# EAGLE board shimboard_revC_V4 (EAGLE 9.1.1), part 1 of 2
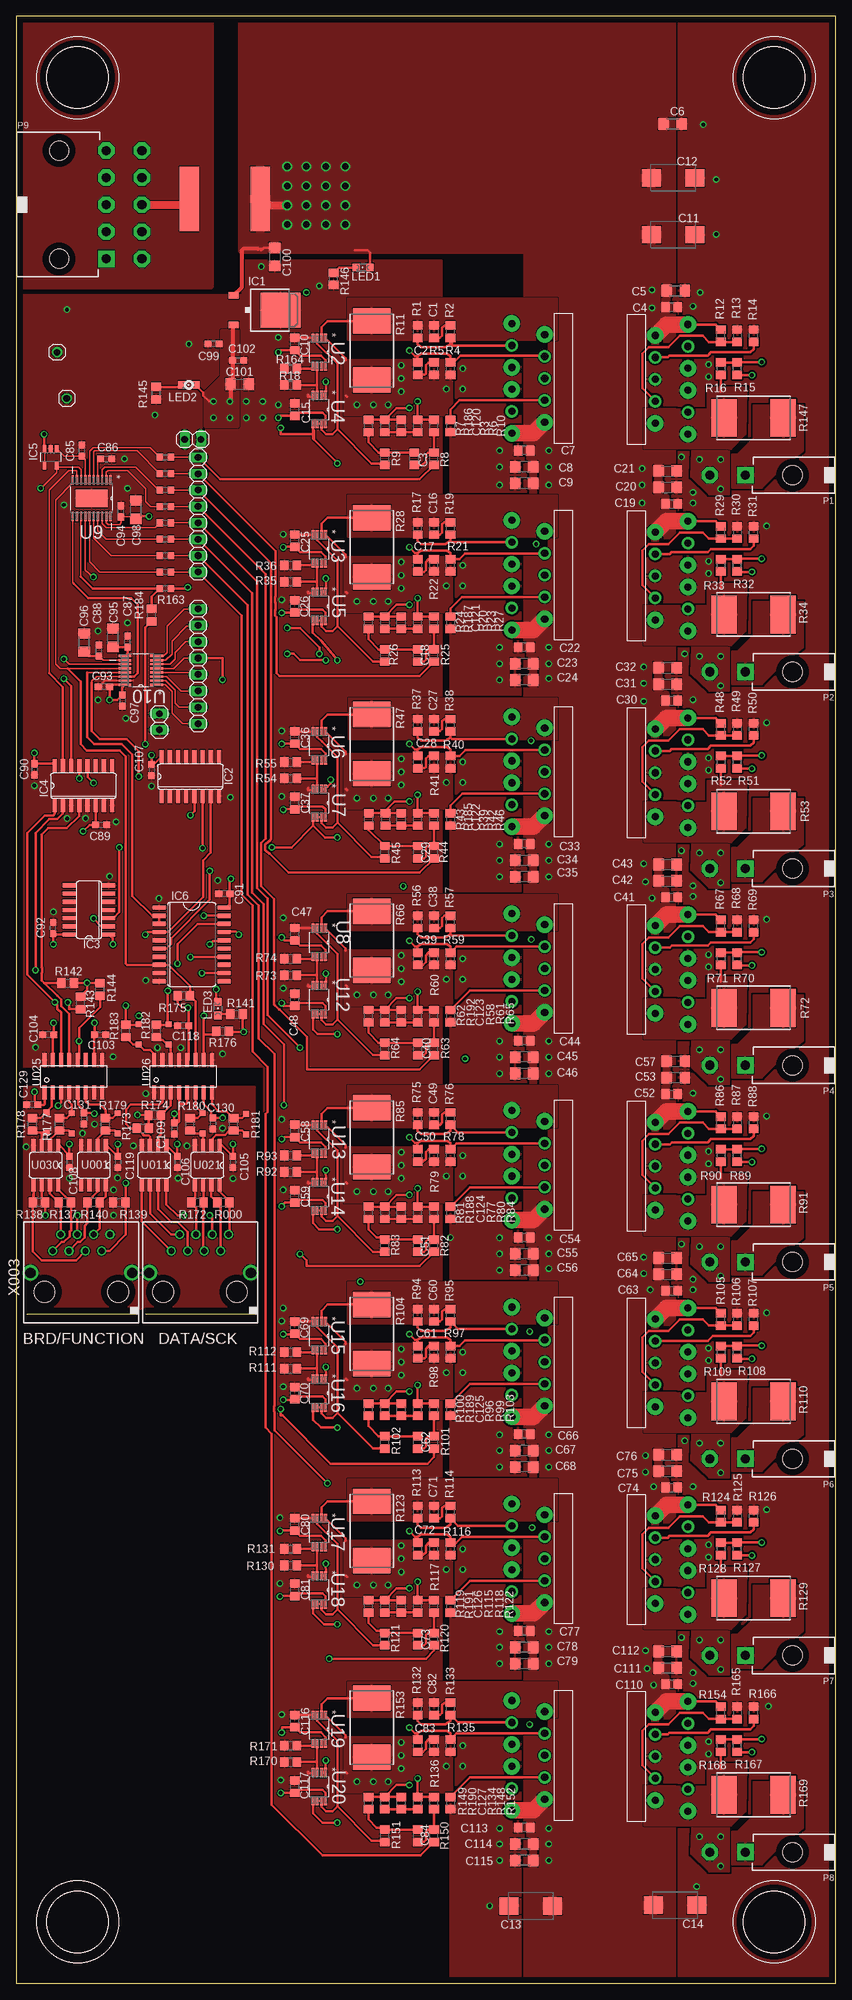
[diagram p0: board, top side]
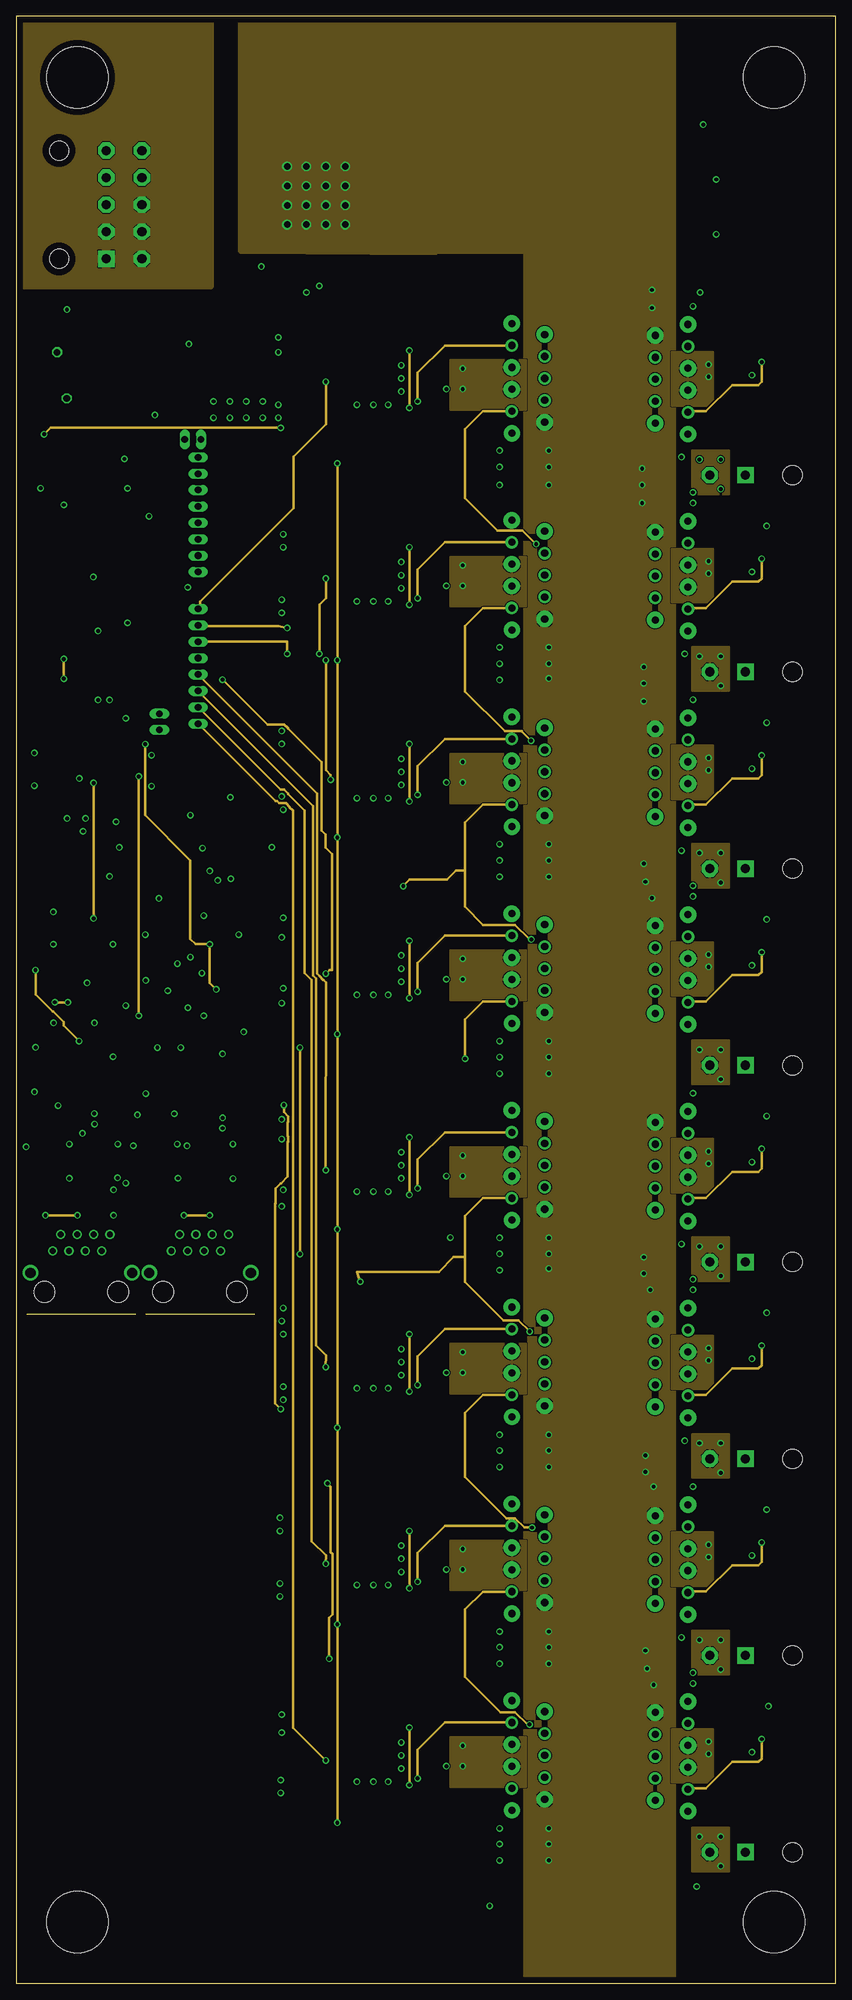
[diagram p1: board, inner layer Route2]
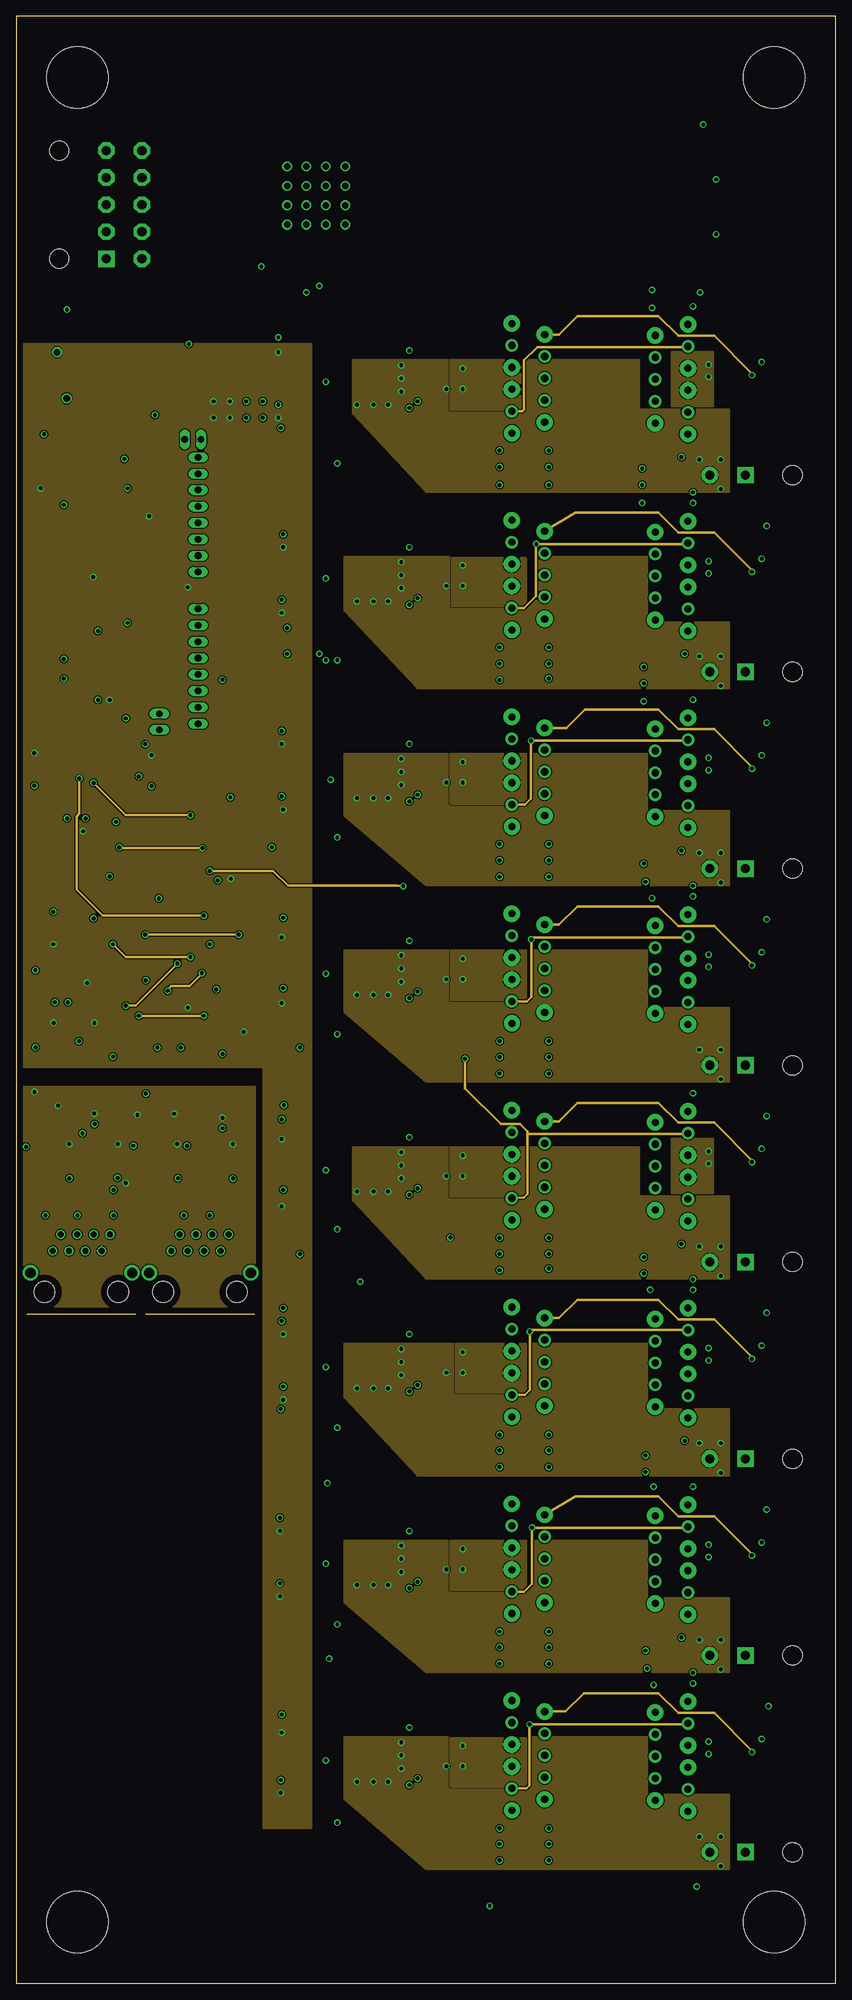
[diagram p2: board, inner layer Route15]
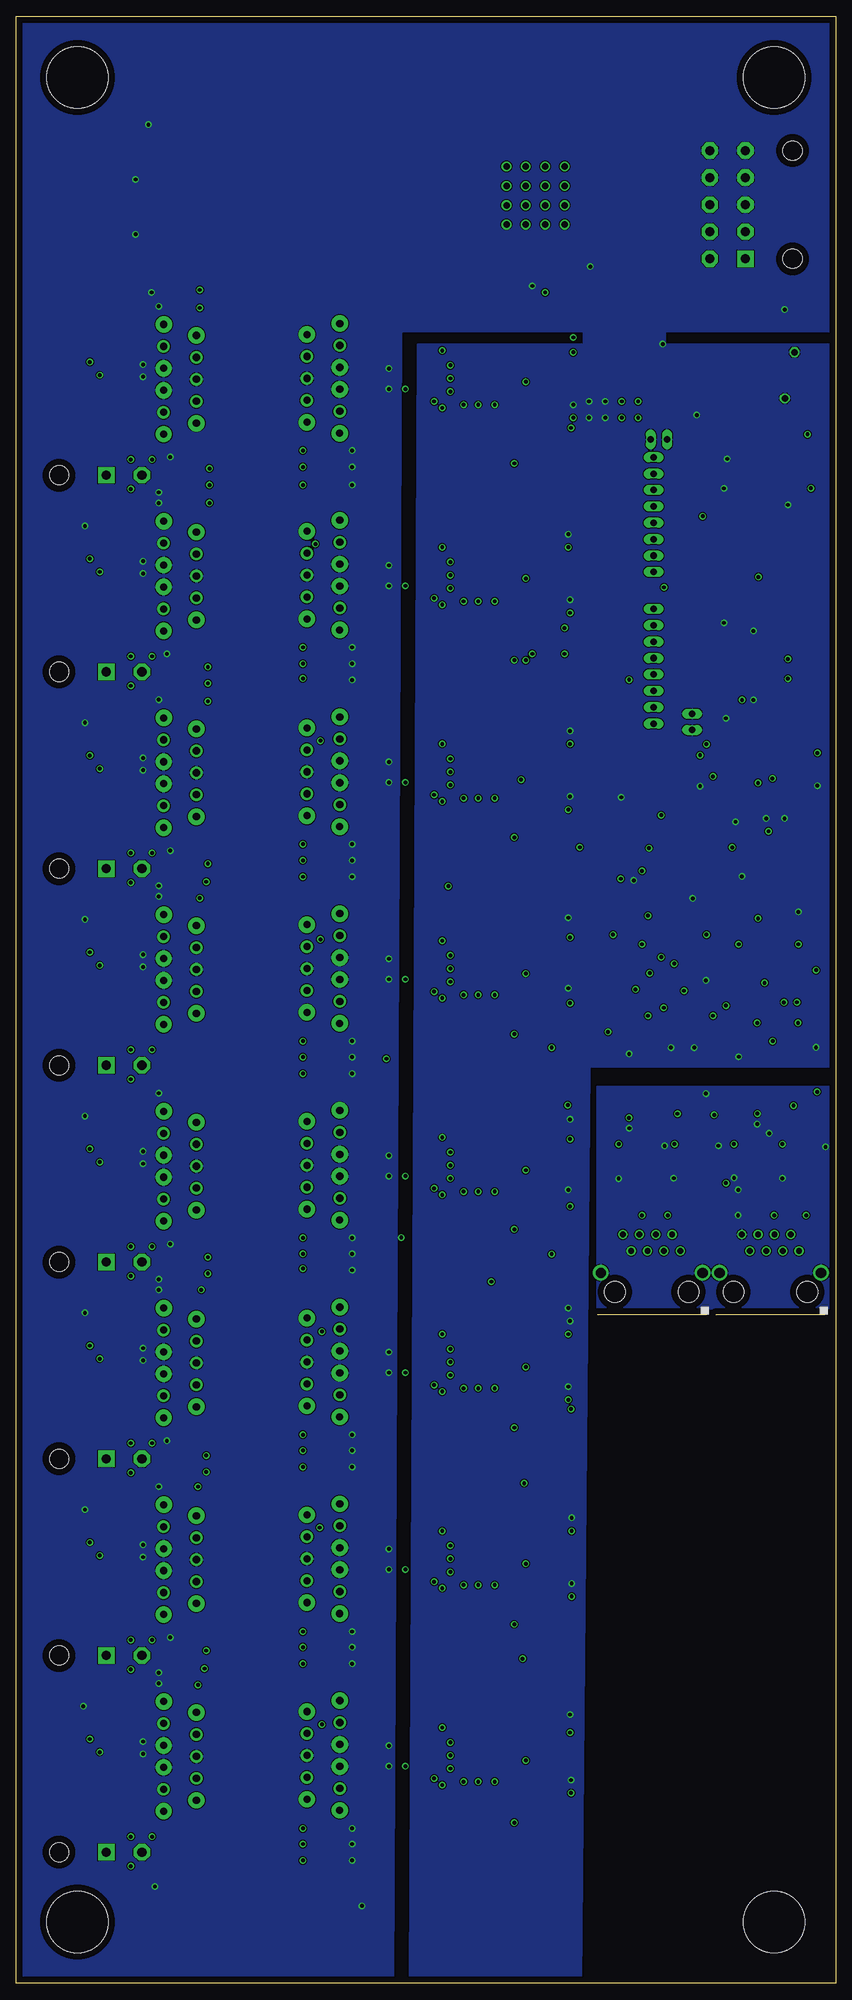
[diagram p3: board, bottom side, seen from below]

Size 127 x 304.8 mm. Coordinates in mm from the lower left corner, seen from the top.
Outline: 0,0 127,0 127,304.8 0,304.8 0,0
Copper layers (1+2*15+16): Top 0.035mm / dielectric 0.5mm / Route2 0.035mm / dielectric 0.5mm / Route15 0.035mm / dielectric 0.5mm / Bottom 0.035mm
Design rules "default *": minimum track width 10mil, minimum drill 0.3mm, track to track 6mil, track to pad 6mil, pad to pad 6mil, via to via 0.3mm, smd to smd 6mil, copper to edge 40mil, drill to drill 0.3mm, minimum pad ring 10mil, minimum via ring 8mil, stop-mask expansion 4mil, vias tented up to drill 0mil, thermal gap 6mil
Holes 9.53 mm at 9.53,9.53 117.47,9.53 9.53,295.27 117.47,295.27
tKeepout: area 3.4,3.4 to 15.6,15.6; area 111.4,3.4 to 123.6,15.6; area 3.4,289.2 to 15.6,301.4; area 111.4,289.2 to 123.6,301.4

## Footprints (pad centres in the part's own frame; a part is rotated, then mirrored left to right if it is on the bottom)
C0805 = smd 1.3 x 1.5: 1 -0.95,0; 2 0.95,0
C1206 = smd 1.6 x 1.8: 1 -1.4,0; 2 1.4,0
D/7343-31W = smd 2.95 x 2.7: + 3.375,0; - -3.375,0
C0603 = smd 1.1 x 1: 1 -0.85,0; 2 0.85,0
LINEAR_TO252 = smd 1 x 1.6: 1 -2.28,-4.8; 2 2.28,-4.8 | smd 5.4 x 6.2: 3 0,2.5
SO16 = smd 0.66 x 2.032: 1 -4.445,-3.073; 2 -3.175,-3.073; 3 -1.905,-3.073; 4 -0.635,-3.073; 5 0.635,-3.073; 6 1.905,-3.073; 7 3.175,-3.073; 8 4.445,-3.073; 9 4.445,3.073; 10 3.175,3.073; 11 1.905,3.073; 12 0.635,3.073; 13 -0.635,3.073; 14 -1.905,3.073; 15 -3.175,3.073; 16 -4.445,3.073
SO14 = smd 0.66 x 2.032: 1 -3.81,-3.073; 2 -2.54,-3.073; 3 -1.27,-3.073; 4 0,-3.073; 5 1.27,-3.073; 6 2.54,-3.073; 7 3.81,-3.073; 8 3.81,3.073; 9 2.54,3.073; 10 1.27,3.073; 11 0,3.073; 12 -1.27,3.073; 13 -2.54,3.073; 14 -3.81,3.073
SOT23-5 = smd 0.6 x 1.2: 1 -0.95,-1.306; 2 0,-1.306; 3 0.95,-1.306; 4 0.95,1.306; 5 -0.95,1.306
SO20W = smd 0.66 x 2.032: 1 -5.715,-5.029; 2 -4.445,-5.029; 3 -3.175,-5.029; 4 -1.905,-5.029; 5 -0.635,-5.029; 6 0.635,-5.029; 7 1.905,-5.029; 8 3.175,-5.029; 9 4.445,-5.029; 10 5.715,-5.029; 11 5.715,5.029; 12 4.445,5.029; 13 3.175,5.029; 14 1.905,5.029; 15 0.635,5.029; 16 -0.635,5.029; 17 -1.905,5.029; 18 -3.175,5.029; 19 -4.445,5.029; 20 -5.715,5.029
1X08 = drill 1.016 long: 1 -8.89,0; 2 -6.35,0; 3 -3.81,0; 4 -1.27,0; 5 1.27,0; 6 3.81,0; 7 6.35,0; 8 8.89,0
1X02 = drill 1.016 long: 1 -1.27,0; 2 1.27,0
1X01 = drill 1.016 octagon: 1 0,0
CHIPLED_0805 = smd 1.2 x 1.2: A 0,-1.05; C 0,1.05
39-30-?02? = drill 1.422 pad 2.54 square: 1 0,0 | drill 1.422 pad 2.54 octagon: 2 0,5.512 | hole 3: 0,-7.3
39-30-?10? = drill 1.422 pad 2.54 square: 1 8.382,0 | drill 1.422 pad 2.54 octagon: 2 4.191,0; 3 0,0; 4 -4.191,0; 5 -8.382,0; 6 8.382,5.512; 7 4.191,5.512; 8 0,5.512; 9 -4.191,5.512; 10 -8.382,5.512 | hole 3: -8.382,-7.3; 8.382,-7.3
R0805 = smd 1.3 x 1.5: 1 -0.95,0; 2 0.95,0
R4527 = smd 3.94 x 5.84: 1 -4.575,0; 2 4.575,0
M0805 = smd 1.3 x 1.6: 1 -0.95,0; 2 0.95,0
R0603 = smd 1 x 1.1: 1 -0.85,0; 2 0.85,0
SO08-1 = smd 0.66 x 2.032: 1 -1.905,-3.073; 2 -0.635,-3.073; 3 0.635,-3.073; 4 1.905,-3.073; 5 1.905,3.073; 6 0.635,3.073; 7 -0.635,3.073; 8 -1.905,3.073
SOP65P490X110-8N = smd 1.422 x 0.432: 1 -2.184,0.965; 2 -2.184,0.33; 3 -2.184,-0.33; 4 -2.184,-0.965; 5 2.184,-0.965; 6 2.184,-0.33; 7 2.184,0.33; 8 2.184,0.965
SOP65P640X120-21N = smd 1.473 x 0.356: 1 -2.819,2.921; 2 -2.819,2.286; 3 -2.819,1.626; 4 -2.819,0.965; 5 -2.819,0.33; 6 -2.819,-0.33; 7 -2.819,-0.965; 8 -2.819,-1.626; 9 -2.819,-2.286; 10 -2.819,-2.921; 11 2.819,-2.921; 12 2.819,-2.286; 13 2.819,-1.626; 14 2.819,-0.965; 15 2.819,-0.33; 16 2.819,0.33; 17 2.819,0.965; 18 2.819,1.626; 19 2.819,2.286; 20 2.819,2.921 | smd 2.743 x 4.953: 21 0,0
SOP63P600X175-16N = smd 1.981 x 0.356: 1 -2.464,2.235; 2 -2.464,1.575; 3 -2.464,0.965; 4 -2.464,0.305; 5 -2.464,-0.305; 6 -2.464,-0.965; 7 -2.464,-1.575; 8 -2.464,-2.235; 9 2.464,-2.235; 10 2.464,-1.575; 11 2.464,-0.965; 12 2.464,-0.305; 13 2.464,0.305; 14 2.464,0.965; 15 2.464,1.575; 16 2.464,2.235
ACSL-SO16 = smd 2.16 x 0.64: 1 -0.96,9.6; 2 -0.96,8.32; 3 -0.96,7.04; 4 -0.96,5.76; 5 -0.96,4.48; 6 -0.96,3.2; 7 -0.96,1.92; 8 -0.96,0.64; 9 4.05,0.64; 10 4.05,1.92; 11 4.05,3.2; 12 4.05,4.48; 13 4.05,5.76; 14 4.05,7.04; 15 4.05,8.32; 16 4.05,9.6
881 = smd 3 x 10: P$1 -5,0; P$2 6,0
1N4148 = smd 0.9 x 0.95: 1 -1.6,0; 2 1.55,0
OPA549 = drill 1.1 pad 2.54: PIN$1 0,0; PIN$2 1.7,5.08; PIN$5 6.8,0; PIN$7 10.2,0; PIN$10 15.3,5.08; PIN$11 17,0.02 | drill 1.1 pad 1.93: PIN$3 3.4,0; PIN$4 5.1,5.08; PIN$6 8.5,5.08; PIN$8 11.9,5.08; PIN$9 13.6,0
RJ45-VERTICAL = drill 0.9 pad 1.4: 1 -4.445,6.35; 2 -3.175,8.89; 3 -1.905,6.35; 4 -0.635,8.89; 5 0.635,6.35; 6 1.905,8.89; 7 3.175,6.35; 8 4.445,8.89 | drill 1.6 pad 2.1: G1 -7.875,2.95; G2 7.875,2.95 | hole 3.251: -5.715,0; 5.715,0

## Placement (x,y rotation side)
C1  100pF  [C0805]  64.77,255.91 90 top
C2  100pF  [C0805]  62.23,250.19 90 top
C3  1n  [C0805]  61.73,236.22 90 top
C4  0.1uF  [C0805]  101.6,259.71 0 top
C5  10uF  [C1206]  102.23,262.25 0 top
C6  10uF  [C1206]  101.73,288.12 0 top
C7  0.1uF  [C0805]  78.74,237.49 180 top
C8  10uF  [C1206]  78.74,234.95 180 top
C9  10uF  [C1206]  78.74,232.41 180 top
C10  0.1uF  [C0805]  43.18,254 90 top
C11  100u  [D/7343-31W]  101.85,270.94 180 top
C12  100u  [D/7343-31W]  101.85,279.75 180 top
C13  100u  [D/7343-31W]  79.76,11.99 0 top
C14  100u  [D/7343-31W]  102.11,12.11 180 top
C15  0.1uF  [C0805]  43.18,243.84 90 top
C16  100pF  [C0805]  64.77,225.43 90 top
C17  100pF  [C0805]  62.23,219.71 90 top
C18  1n  [C0805]  62.23,205.74 90 top
C19  0.1uF  [C0805]  101.6,229.24 0 top
C20  10uF  [C1206]  100.97,231.78 0 top
C21  10uF  [C1206]  100.97,234.31 0 top
C22  0.1uF  [C0805]  78.74,207.01 180 top
C23  10uF  [C1206]  78.74,204.47 180 top
C24  10uF  [C1206]  78.74,201.93 180 top
C25  0.1uF  [C0805]  43.18,223.52 90 top
C26  0.1uF  [C0805]  43.18,213.36 90 top
C27  100pF  [C0805]  64.77,194.94 90 top
C28  100pF  [C0805]  62.23,189.23 90 top
C29  1n  [C0805]  62.23,175.26 90 top
C30  0.1uF  [C0805]  101.6,198.75 0 top
C31  10uF  [C1206]  100.97,201.29 0 top
C32  10uF  [C1206]  100.97,203.84 0 top
C33  0.1uF  [C0805]  78.74,176.53 180 top
C34  10uF  [C1206]  78.74,173.99 180 top
C35  10uF  [C1206]  78.74,171.45 180 top
C36  0.1uF  [C0805]  43.18,193.04 90 top
C37  0.1uF  [C0805]  43.18,182.88 90 top
C38  100pF  [C0805]  64.77,164.47 90 top
C39  100pF  [C0805]  62.23,158.75 90 top
C40  1n  [C0805]  62.23,144.78 90 top
C41  0.1uF  [C0805]  101.6,168.28 0 top
C42  10uF  [C1206]  100.97,170.81 0 top
C43  10uF  [C1206]  100.97,173.35 0 top
C44  0.1uF  [C0805]  78.74,146.05 180 top
C45  10uF  [C1206]  78.74,143.51 180 top
C46  10uF  [C1206]  78.74,140.97 180 top
C47  0.1uF  [C0805]  43.18,162.56 90 top
C48  0.1uF  [C0805]  43.18,152.4 90 top
C49  100pF  [C0805]  64.77,133.99 90 top
C50  100pF  [C0805]  62.23,128.27 90 top
C51  1n  [C0805]  62.23,114.3 90 top
C52  0.1uF  [C0805]  101.6,137.79 0 top
C53  10uF  [C1206]  102.23,140.34 0 top
C54  0.1uF  [C0805]  78.74,115.57 180 top
C55  10uF  [C1206]  78.74,113.03 180 top
C56  10uF  [C1206]  78.74,110.49 180 top
C57  10uF  [C1206]  102.23,142.88 0 top
C58  0.1uF  [C0805]  43.18,132.08 90 top
C59  0.1uF  [C0805]  43.18,121.92 90 top
C60  100pF  [C0805]  64.77,103.5 90 top
C61  100pF  [C0805]  62.23,97.79 90 top
C62  1n  [C0805]  62.23,83.82 90 top
C63  0.1uF  [C0805]  101.6,107.31 0 top
C64  10uF  [C1206]  100.97,109.86 0 top
C65  10uF  [C1206]  100.97,112.39 0 top
C66  0.1uF  [C0805]  78.74,85.09 180 top
C67  10uF  [C1206]  78.74,82.55 180 top
C68  10uF  [C1206]  78.74,80.01 180 top
C69  0.1uF  [C0805]  43.18,101.6 90 top
C70  0.1uF  [C0805]  43.18,91.44 90 top
C71  100pF  [C0805]  64.77,73.03 90 top
C72  100pF  [C0805]  62.23,67.31 90 top
C73  1n  [C0805]  62.23,53.34 90 top
C74  0.1uF  [C0805]  101.6,76.83 0 top
C75  10uF  [C1206]  100.97,79.38 0 top
C76  10uF  [C1206]  100.97,81.92 0 top
C77  0.1uF  [C0805]  78.74,54.61 180 top
C78  10uF  [C1206]  78.74,52.07 180 top
C79  10uF  [C1206]  78.74,49.53 180 top
C80  0.1uF  [C0805]  43.18,71.12 90 top
C81  0.1uF  [C0805]  43.18,60.96 90 top
C82  100pF  [C0805]  64.77,42.55 90 top
C83  100pF  [C0805]  62.23,36.83 90 top
C84  1n  [C0805]  62.23,22.86 90 top
C85  0.1uF  [C0603]  10.18,237.47 90 top
C86  0.1uF  [C0603]  13.99,236.2 0 top
C87  0.1uF  [C0603]  17.29,207.88 90 top
C88  0.1uF  [C0603]  12.84,206.48 90 top
C89  0.1uF  [C0603]  13.16,179.5 0 top
C90  0.1uF  [C0603]  2.81,188.11 270 top
C91  0.1uF  [C0603]  32.27,168.85 180 top
C92  0.1uF  [C0603]  5.75,163.5 90 top
C93  0.1uF  [C0603]  13.61,200.89 180 top
C94  0.1uF  [C0603]  16.27,228.07 90 top
C95  10uF  [C1206]  15,208.5 90 top
C96  10uF  [C1206]  10.56,207.73 90 top
C97  1uF  [C0603]  16.47,198.78 270 top
C98  10uF  [C1206]  18.56,228.32 90 top
C99  0.1uF  [C0603]  30.59,254 180 top
C100  10uF  [C1206]  40.09,267.5 270 top
C101  10uF  [C1206]  34.65,247.78 0 top
C102  0.1uF  [C0603]  34.4,251.46 0 top
C103  0.1uF  [C0603]  13,147 0 top
C104  0.1uF  [C0603]  5,147 180 top
C105  0.1uF  [C0603]  33.62,127.25 270 top
C106  0.1uF  [C0603]  25.01,127.25 270 top
C107  0.1uF  [C0603]  21,188 270 top
C108  0.1uF  [C0603]  8.25,127.25 270 top
C109  0.1uF  [C0603]  24.51,132.46 270 top
C110  0.1uF  [C0805]  101.6,46.35 0 top
C111  10uF  [C1206]  100.97,48.9 0 top
C112  10uF  [C1206]  100.97,51.44 0 top
C113  0.1uF  [C0805]  78.74,24.13 180 top
C114  10uF  [C1206]  78.74,21.59 180 top
C115  10uF  [C1206]  78.74,19.05 180 top
C116  0.1uF  [C0805]  43.18,40.64 90 top
C117  0.1uF  [C0805]  43.18,30.48 90 top
C118  0.1uF  [C0603]  25.9,148.4 180 top
C119  0.1uF  [C0603]  15.75,127.25 270 top
C120  220p  [C0805]  59.69,241.3 90 top
C121  220p  [C0805]  59.69,210.82 90 top
C122  220p  [C0805]  59.69,180.34 90 top
C123  220p  [C0805]  59.69,149.86 90 top
C124  220p  [C0805]  59.69,119.38 90 top
C125  220p  [C0805]  59.69,88.9 90 top
C126  220p  [C0805]  59.69,58.42 90 top
C127  220p  [C0805]  59.69,27.94 90 top
C129  0.1uF  [C0603]  2.5,136.12 180 top
C130  0.1uF  [C0603]  30.48,133.22 270 top
C131  0.1uF  [C0603]  10.5,133.98 270 top
IC1  LINEAR_7805DT  [LINEAR_TO252]  38.5,259.25 270 top
IC2  74LS279D  [SO16]  27,187 0 top
IC3  7400D  [SO14]  11.3,166.32 90 top
IC4  74LS138D  [SO16]  10.43,185.57 0 top
IC5  LMV321M5  [SOT23-5]  5.35,236.45 180 top
IC6  74LS240DW  [SO20W]  27.21,160.98 270 top
JP1  [1X08]  28.21,204.06 270 top
JP2  [1X08]  28.21,227.56 270 top
JP3  [1X02]  22.21,195.46 90 top
JP4  [1X02]  27.39,239.21 180 top
JP5  [1X01]  7.84,245.58 0 top
JP6  [1X01]  6.35,252.73 0 top
LED1  [CHIPLED_0805]  53.78,265.85 90 top
LED2  [CHIPLED_0805]  26.78,247.65 90 top
LED3  [CHIPLED_0805]  31.25,151 0 top
P1  39-30-02?_S  [39-30-?02?]  113.03,233.68 90 top
P2  39-30-02?_S  [39-30-?02?]  113.03,203.2 90 top
P3  39-30-02?_S  [39-30-?02?]  113.03,172.72 90 top
P4  39-30-02?_S  [39-30-?02?]  113.03,142.24 90 top
P5  39-30-02?_S  [39-30-?02?]  113.03,111.76 90 top
P6  39-30-02?_S  [39-30-?02?]  113.03,81.28 90 top
P7  39-30-02?_S  [39-30-?02?]  113.03,50.8 90 top
P8  39-30-02?_S  [39-30-?02?]  113.03,20.32 90 top
P9  39-30-10?_S  [39-30-?10?]  13.97,275.59 270 top
R000  100  [R0805]  32.12,121 180 top
R1  51.1k  [R0805]  62.23,255.91 90 top
R2  5.1k  [R0805]  67.31,255.91 90 top
R3  22k  [R0805]  62.23,241.3 90 top
R4  51.1k  [R0805]  67.31,250.19 90 top
R5  5.1k  [R0805]  64.77,250.19 90 top
R6  68.1k  [R0805]  64.77,241.3 90 top
R7  68.1k  [R0805]  54.61,241.3 90 top
R8  10k  [R0805]  64.77,236.22 90 top
R9  10k  [R0805]  57.15,236.22 90 top
R10  10k  [R0805]  67.31,241.3 270 top
R11  0.2  [R4527]  55.12,252.98 270 top
R12  2k  [M0805]  109.22,255.27 270 top
R13  2k  [R0805]  111.76,255.27 270 top
R14  10k  [R0805]  114.3,255.27 90 top
R15  2k  [R0805]  111.76,250.19 90 top
R16  2k  [R0805]  109.22,250.19 270 top
R17  51.1k  [R0805]  62.23,225.43 90 top
R18  10k  [R0805]  42.55,247.65 0 top
R19  5.1k  [R0805]  67.31,225.43 90 top
R20  22k  [R0805]  62.23,210.82 90 top
R21  51.1k  [R0805]  67.31,219.71 90 top
R22  5.1k  [R0805]  64.77,219.71 90 top
R23  68.1k  [R0805]  64.77,210.82 90 top
R24  68.1k  [R0805]  54.61,210.82 90 top
R25  10k  [R0805]  64.77,205.74 90 top
R26  10k  [R0805]  57.15,205.74 90 top
R27  10k  [R0805]  67.31,210.82 270 top
R28  0.2  [R4527]  55.12,222.5 270 top
R29  2k  [M0805]  109.22,224.79 270 top
R30  2k  [R0805]  111.76,224.79 270 top
R31  10k  [R0805]  114.3,224.79 90 top
R32  2k  [R0805]  111.76,219.71 90 top
R33  2k  [R0805]  109.22,219.71 270 top
R34  0.2  [R4527]  114.3,212.09 0 top
R35  10k  [R0805]  42.55,217.17 0 top
R36  10k  [R0805]  42.55,219.71 0 top
R37  51.1k  [R0805]  62.23,194.94 90 top
R38  5.1k  [R0805]  67.31,194.94 90 top
R39  22k  [R0805]  62.23,180.34 90 top
R40  51.1k  [R0805]  67.31,189.23 90 top
R41  5.1k  [R0805]  64.77,189.23 90 top
R42  68.1k  [R0805]  64.77,180.34 90 top
R43  68.1k  [R0805]  54.65,180.34 90 top
R44  10k  [R0805]  64.77,175.26 90 top
R45  10k  [R0805]  57.15,175.26 90 top
R46  10k  [R0805]  67.31,180.34 270 top
R47  0.2  [R4527]  55.12,192.02 270 top
R48  2k  [M0805]  109.22,194.31 270 top
R49  2k  [R0805]  111.76,194.31 270 top
R50  10k  [R0805]  114.3,194.31 90 top
R51  2k  [R0805]  111.76,189.23 90 top
R52  2k  [R0805]  109.22,189.23 270 top
R53  0.2  [R4527]  114.3,181.61 0 top
R54  10k  [R0805]  42.55,186.69 0 top
R55  10k  [R0805]  42.55,189.23 0 top
R56  51.1k  [R0805]  62.23,164.47 90 top
R57  5.1k  [R0805]  67.31,164.47 90 top
R58  22k  [R0805]  62.23,149.86 90 top
R59  51.1k  [R0805]  67.31,158.75 90 top
R60  5.1k  [R0805]  64.77,158.75 90 top
R61  68.1k  [R0805]  64.77,149.86 90 top
R62  68.1k  [R0805]  54.61,149.86 90 top
R63  10k  [R0805]  64.77,144.78 90 top
R64  10k  [R0805]  57.15,144.78 90 top
R65  10k  [R0805]  67.31,149.86 270 top
R66  0.2  [R4527]  55.12,161.54 270 top
R67  2k  [M0805]  109.22,163.83 270 top
R68  2k  [R0805]  111.76,163.83 270 top
R69  10k  [R0805]  114.3,163.83 90 top
R70  2k  [R0805]  111.76,158.75 90 top
R71  2k  [R0805]  109.22,158.75 270 top
R72  0.2  [R4527]  114.3,151.13 0 top
R73  10k  [R0805]  42.55,156.21 0 top
R74  10k  [R0805]  42.55,158.75 0 top
R75  51.1k  [R0805]  62.23,133.99 90 top
R76  5.1k  [R0805]  67.31,133.99 90 top
R77  22k  [R0805]  62.23,119.38 90 top
R78  51.1k  [R0805]  67.31,128.27 90 top
R79  5.1k  [R0805]  64.77,128.27 90 top
R80  68.1k  [R0805]  64.77,119.38 90 top
R81  68.1k  [R0805]  54.61,119.38 90 top
R82  10k  [R0805]  64.77,114.3 90 top
R83  10k  [R0805]  57.15,114.3 90 top
R84  10k  [R0805]  67.31,119.38 270 top
R85  0.2  [R4527]  55.12,131.06 270 top
R86  2k  [M0805]  109.22,133.35 270 top
R87  2k  [R0805]  111.76,133.35 270 top
R88  10k  [R0805]  114.3,133.35 90 top
R89  2k  [R0805]  111.76,128.27 90 top
R90  2k  [R0805]  109.22,128.27 270 top
R91  0.2  [R4527]  114.3,120.65 0 top
R92  10k  [R0805]  42.55,125.73 0 top
R93  10k  [R0805]  42.55,128.27 0 top
R94  51.1k  [R0805]  62.23,103.5 90 top
R95  5.1k  [R0805]  67.31,103.5 90 top
R96  22k  [R0805]  62.23,88.9 90 top
R97  51.1k  [R0805]  67.31,97.79 90 top
R98  5.1k  [R0805]  64.77,97.79 90 top
R99  68.1k  [R0805]  64.77,88.9 90 top
R100  68.1k  [R0805]  54.61,88.9 90 top
R101  10k  [R0805]  64.77,83.82 90 top
R102  10k  [R0805]  57.15,83.82 90 top
R103  10k  [R0805]  67.31,88.9 270 top
R104  0.2  [R4527]  55.12,100.58 270 top
R105  2k  [M0805]  109.22,102.87 270 top
R106  2k  [R0805]  111.76,102.87 270 top
R107  10k  [R0805]  114.3,102.87 90 top
R108  2k  [R0805]  111.76,97.79 90 top
R109  2k  [R0805]  109.22,97.79 270 top
R110  0.2  [R4527]  114.3,90.17 0 top
R111  10k  [R0805]  42.55,95.25 0 top
R112  10k  [R0805]  42.55,97.79 0 top
R113  51.1k  [R0805]  62.23,73.03 90 top
R114  5.1k  [R0805]  67.31,73.03 90 top
R115  22k  [R0805]  62.23,58.42 90 top
R116  51.1k  [R0805]  67.31,67.31 90 top
R117  5.1k  [R0805]  64.77,67.31 90 top
R118  68.1k  [R0805]  64.77,58.42 90 top
R119  68.1k  [R0805]  54.61,58.42 90 top
R120  10k  [R0805]  64.77,53.34 90 top
R121  10k  [R0805]  57.15,53.34 90 top
R122  10k  [R0805]  67.31,58.42 270 top
R123  0.2  [R4527]  55.12,70.1 270 top
R124  2k  [M0805]  109.22,72.39 270 top
R125  2k  [R0805]  111.76,72.39 270 top
R126  10k  [R0805]  114.3,72.39 90 top
R127  2k  [R0805]  111.76,67.31 90 top
R128  2k  [R0805]  109.22,67.31 270 top
R129  0.2  [R4527]  114.3,59.69 0 top
R130  10k  [R0805]  42.55,64.77 0 top
R131  10k  [R0805]  42.55,67.31 0 top
R132  51.1k  [R0805]  62.23,42.55 90 top
R133  5.1k  [R0805]  67.31,42.55 90 top
R134  22k  [R0805]  62.23,27.94 90 top
R135  51.1k  [R0805]  67.31,36.83 90 top
R136  5.1k  [R0805]  64.77,36.83 90 top
R137  100  [R0805]  7.55,121 0 top
R138  100  [R0805]  3.55,121 180 top
R139  100  [R0805]  16,121 0 top
R140  100  [R0805]  12,121 180 top
R141  2k  [R0805]  34.17,150.19 0 top
R142  330  [R0805]  8,155 0 top
R143  330  [R0805]  10,151.9 90 top
R144  330  [R0805]  13,154 90 top
R145  2k  [R0805]  21.7,246.38 90 top
R146  2k  [R0805]  49.2,264.08 90 top
R147  0.2  [R4527]  114.3,242.57 0 top
R148  68.1k  [R0805]  64.77,27.94 90 top
R149  68.1k  [R0805]  54.61,27.94 90 top
R150  10k  [R0805]  64.77,22.86 90 top
R151  10k  [R0805]  57.15,22.86 90 top
R152  10k  [R0805]  67.31,27.94 270 top
R153  0.2  [R4527]  55.12,39.62 270 top
R154  2k  [M0805]  109.22,41.91 270 top
R155  0  [R0603]  23.13,236.45 0 top
R156  0  [R0603]  23.13,233.91 0 top
R157  0  [R0603]  23.13,231.37 0 top
R158  0  [R0603]  23.13,228.83 0 top
R159  0  [R0603]  23.13,226.29 0 top
R160  0  [R0603]  23.13,223.75 0 top
R161  0  [R0603]  23.13,221.21 0 top
R162  0  [R0603]  23.13,218.67 0 top
R163  10k  [R0603]  23.13,216.13 180 top
R164  10k  [R0805]  42.55,250.19 0 top
R165  2k  [R0805]  111.76,41.91 270 top
R166  10k  [R0805]  114.3,41.91 90 top
R167  2k  [R0805]  111.76,36.83 90 top
R168  2k  [R0805]  109.22,36.83 270 top
R169  0.2  [R4527]  114.3,29.21 0 top
R170  10k  [R0805]  42.55,34.29 0 top
R171  10k  [R0805]  42.55,36.83 0 top
R172  100  [R0805]  28.12,121 180 top
R173  330  [R0805]  19.64,132.48 0 top
R174  330  [R0805]  21.49,134.52 180 top
R175  330  [R0805]  26,153 180 top
R176  330  [R0805]  32,147.5 0 top
R177  330  [R0805]  6.73,133.1 90 top
R178  330  [R0805]  2.54,133.1 90 top
R179  330  [R0805]  13.84,133.1 90 top
R180  330  [R0805]  26.96,133.1 90 top
R181  330  [R0805]  33.72,133.1 90 top
R182  330  [R0805]  21.76,147.57 90 top
R183  330  [R0805]  17,147.57 90 top
R184  100  [R0805]  21,212 90 top
R185  2Meg  [R0805]  57.25,180.34 270 top
R186  2Meg  [R0805]  57.15,241.3 270 top
R187  2Meg  [R0805]  57.15,210.82 270 top
R188  2Meg  [R0805]  57.15,119.38 270 top
R189  2Meg  [R0805]  57.15,88.9 270 top
R190  2Meg  [R0805]  57.15,27.94 270 top
R191  2Meg  [R0805]  57.15,58.42 270 top
R192  2Meg  [R0805]  57.15,149.86 270 top
U001  65LVDS34  [SO08-1]  12,126.75 180 top
U2  INA170EA/250  [SOP65P490X110-8N]  46.99,252.73 270 top
U3  INA170EA/250  [SOP65P490X110-8N]  46.99,222.25 270 top
U4  OPA2340EA/250  [SOP65P490X110-8N]  46.99,243.84 270 top
U5  OPA2340EA/250  [SOP65P490X110-8N]  46.99,213.36 270 top
U6  INA170EA/250  [SOP65P490X110-8N]  46.99,191.77 270 top
U7  OPA2340EA/250  [SOP65P490X110-8N]  46.99,182.88 270 top
U8  INA170EA/250  [SOP65P490X110-8N]  46.99,161.29 270 top
U9  LTC2656BCFE-H16PBF  [SOP65P640X120-21N]  11.7,230.1 270 top
U10  LTC1863CGNPBF  [SOP63P600X175-16N]  19.32,203.43 180 top
U011  65LVDS9638  [SO08-1]  21.38,126.75 180 top
U12  OPA2340EA/250  [SOP65P490X110-8N]  46.99,152.4 270 top
U13  INA170EA/250  [SOP65P490X110-8N]  46.99,130.81 270 top
U14  OPA2340EA/250  [SOP65P490X110-8N]  46.99,121.92 270 top
U15  INA170EA/250  [SOP65P490X110-8N]  46.99,100.33 270 top
U16  OPA2340EA/250  [SOP65P490X110-8N]  46.99,91.44 270 top
U17  INA170EA/250  [SOP65P490X110-8N]  46.99,69.85 270 top
U18  OPA2340EA/250  [SOP65P490X110-8N]  46.99,60.96 270 top
U19  INA170EA/250  [SOP65P490X110-8N]  46.99,39.37 270 top
U20  OPA2340EA/250  [SOP65P490X110-8N]  46.99,30.48 270 top
U021  65LVDS34  [SO08-1]  29.62,126.75 180 top
U025  ACSL-6400  [ACSL-SO16]  14,139 90 top
U026  ACSL-6420  [ACSL-SO16]  31,139 90 top
U030  65LVDS34  [SO08-1]  4.6,126.75 180 top
U031  0881070  [881]  31.83,276.5 0 top
U040  1N4148  [1N4148]  8.64,133.22 270 top
U041  1N4148  [1N4148]  4.7,133.35 270 top
U042  1N4148  [1N4148]  15.75,133.22 270 top
U043  1N4148  [1N4148]  28.89,133.22 270 top
U044  1N4148  [1N4148]  35.66,133.1 270 top
U045  1N4148  [1N4148]  23.64,147.07 90 top
U046  1N4148  [1N4148]  19,147.07 90 top
U$1  OPA549_HS677NOHS  [OPA549]  76.83,257.18 270 top
U$2  OPA549_HS677NOHS  [OPA549]  104.14,240.03 90 top
U$3  OPA549_HS677NOHS  [OPA549]  76.83,226.69 270 top
U$4  OPA549_HS677NOHS  [OPA549]  104.14,209.55 90 top
U$5  OPA549_HS677NOHS  [OPA549]  76.83,196.22 270 top
U$6  OPA549_HS677NOHS  [OPA549]  104.14,179.07 90 top
U$7  OPA549_HS677NOHS  [OPA549]  76.83,165.74 270 top
U$8  OPA549_HS677NOHS  [OPA549]  104.14,148.59 90 top
U$9  OPA549_HS677NOHS  [OPA549]  76.83,135.25 270 top
U$10  OPA549_HS677NOHS  [OPA549]  104.14,118.11 90 top
U$11  OPA549_HS677NOHS  [OPA549]  76.83,104.78 270 top
U$12  OPA549_HS677NOHS  [OPA549]  104.14,87.63 90 top
U$13  OPA549_HS677NOHS  [OPA549]  76.83,74.3 270 top
U$14  OPA549_HS677NOHS  [OPA549]  104.14,57.15 90 top
U$15  OPA549_HS677NOHS  [OPA549]  76.83,43.81 270 top
U$16  OPA549_HS677NOHS  [OPA549]  104.14,26.67 90 top
X002  RJ45V  [RJ45-VERTICAL]  28.5,107.13 0 top
X003  RJ45V  [RJ45-VERTICAL]  10.1,107.13 0 top

## Library data of the parts
C1 C2 C4-C127 C129-C131 = rcl; SPICEPREFIX: C
C3 = rcl; SPICEPREFIX: 1n
IC1 = fiberInterface_revC_V2
IC2-IC4 IC6 U001 U011 U021 U030 = 74xx-us
IC5 = linear
JP1-JP6 = pinhead
LED1-LED3 = led
P1-P9 = con-molex-mini-fit
R000 R137-R140 R172 R184 = rcl; SPICEPREFIX: 100
R1-R136 R145-R171 R185-R192 = rcl; SPICEPREFIX: R
R141 = rcl; SPICEPREFIX: 2k
R142-R144 R173-R183 = rcl; SPICEPREFIX: 330
U2 U3 U6 U8 U13 U15 U17 U19 = Texas Instruments_By_element14_Batch_1; MPN: INA170EA/250; OC_FARNELL: -; OC_NEWARK: 74C9833; PACKAGE: MSOP-8; SUPPLIER: Texas Instruments
U4 U5 U7 U12 U14 U16 U18 U20 = Texas Instruments_By_element14_Batch_1; MPN: OPA2340EA/250; OC_FARNELL: 1101540; OC_NEWARK: 36K7580; PACKAGE: MSOP-8; SUPPLIER: Texas Instruments
U9 = LTC_By_element14_Batch_1; MPN: LTC2656BCFE-H16#PBF; OC_FARNELL: -; OC_NEWARK: 28R7619; PACKAGE: TSSOP-20; SUPPLIER: Linear Technology
U10 = LTC_By_element14_Batch_1; MPN: LTC1863CGN#PBF; OC_FARNELL: 1503394; OC_NEWARK: 56M4074; PACKAGE: SSOP-16; SUPPLIER: Linear Technology
U025 U026 = ACSL-6xx0
U031 = fuse
U040-U046 = 1N4148
U$1-U$16 = MIT-GPA
X002 X003 = con-tycoelectronics

## Nets
+5V: C10.1 C15.1 C25.1 C26.1 C36.1 C37.1 C47.1 C48.1 C58.1 C59.1 C69.1 C70.1 C80.1 C81.1 C89.1 C90.1 C91.1 C92.1 C93.1 C94.1 C97.1 C98.1 C99.1 C101.1 C102.1 C103.1 C104.1 C107.1 C116.1 C117.1 C118.1 IC1.2 IC2.16 IC3.14 IC4.6 IC4.16 IC5.5 IC6.20 LED2.A R141.2 R142.2 R143.2 R144.2 R163.1 R175.2 R176.2 U2.8 U3.8 U4.8 U5.8 U6.8 U7.8 U8.8 U9.8 U9.14 U9.19 U10.16 U12.8 U13.8 U14.8 U15.8 U16.8 U17.8 U18.8 U19.8 U20.8 U025.10 U025.15 U026.12
+5V/1: C105.1 C106.1 C108.1 C109.1 C119.1 C129.1 C130.1 C131.1 R139.2 R173.2 R174.2 U001.1 U011.1 U021.1 U025.1 U025.3 U025.5 U026.4 U026.5 U026.7 U030.1 X003.7
ADC_SEL: IC4.14 U10.11
BOARD: IC4.4 R142.1 U025.13
BOARD_I: R177.1 U030.2 U040.2
BOARD_II: R177.2 U025.4 U040.1
BOARD_Y: R137.2 U030.8 X003.1
BOARD_Z: R137.1 U030.7 X003.2
C0_O0: P1.2 R4.1 R5.1 R11.2 U2.1
C0_O1: P1.1 R147.2
C1_O0: P2.2 R21.1 R22.1 R28.2 U3.1
C1_O1: P2.1 R34.2
C2_O0: P3.2 R40.1 R41.1 R47.2 U6.1
C2_O1: P3.1 R53.2
C3_O0: P4.2 R59.1 R60.1 R66.2 U8.1
C3_O1: P4.1 R72.2
C4_O0: P5.2 R78.1 R79.1 R85.2 U13.1
C4_O1: P5.1 R91.2
C5_O0: P6.2 R97.1 R98.1 R104.2 U15.1
C5_O1: P6.1 R110.2
C6_O0: P7.1 R129.2
C6_O1: P7.2 R116.1 R117.1 R123.2 U17.1
C7_O0: P8.2 R135.1 R136.1 R153.2 U19.1
C7_O1: P8.1 R169.2
DAC_OUT_A: JP2.1 R8.1 R155.2
DAC_OUT_B: JP2.2 R25.1 R156.2
DAC_OUT_C: JP2.3 R44.1 R157.2
DAC_OUT_D: JP2.4 R63.1 R158.2
DAC_OUT_E: JP2.5 R82.1 R159.2
DAC_OUT_F: JP2.6 R101.1 R160.2
DAC_OUT_G: JP2.7 R120.1 R161.2
DAC_OUT_H: JP2.8 R150.1 R162.2
DAC_REF: IC5.3 IC5.4 U4.5 U5.5 U7.5 U12.5 U14.5 U16.5 U18.5 U20.5
DAC_REF_0: R9.1 U2.3 U4.6 U4.7
DAC_REF_1: R26.1 U3.3 U5.6 U5.7
DAC_REF_2: R45.1 U6.3 U7.6 U7.7
DAC_REF_3: R64.1 U8.3 U12.6 U12.7
DAC_REF_4: R83.1 U13.3 U14.6 U14.7
DAC_REF_5: R102.1 U15.3 U16.6 U16.7
DAC_REF_6: R121.1 U17.3 U18.6 U18.7
DAC_REF_7: R151.1 U19.3 U20.6 U20.7
DAC_REF_OUT: C85.1 IC5.1 U9.7
DAC_SEL: IC4.15 U9.9
FAULT: IC2.6 IC3.3
FAULT_BUFFER: IC3.1 IC6.14
FAULT_OUT: IC6.6 U$1.PIN$9 U$2.PIN$9 U$3.PIN$9 U$4.PIN$9 U$5.PIN$9 U$6.PIN$9 U$7.PIN$9 U$8.PIN$9 U$9.PIN$9 U$10.PIN$9 U$11.PIN$9 U$12.PIN$9 U$13.PIN$9 U$14.PIN$9 U$15.PIN$9 U$16.PIN$9
FAULT_READ: IC4.13 IC6.19
FAULT_RESET: IC2.5 IC3.2 IC4.12
FUNCTION_0: IC4.1 R143.1 U025.14
FUNCTION_0_I: R178.1 U030.3 U041.2
FUNCTION_0_II: R178.2 U025.2 U041.1
FUNCTION_0_Y: R138.1 U030.6 X003.4
FUNCTION_0_Z: R138.2 U030.5 X003.5
FUNCTION_1: IC4.2 R144.1 U025.12
FUNCTION_1_I: R179.1 U001.2 U042.2
FUNCTION_1_II: R179.2 U025.6 U042.1
FUNCTION_1_Y: R140.1 U001.8 X003.6
FUNCTION_1_Z: R140.2 U001.7 X003.3
GND: C4.2 C5.2 C6.2 C7.2 C8.2 C9.2 C10.2 C11.- C12.- C13.- C14.- C15.2 C19.2 C20.2 C21.2 C22.2 C23.2 C24.2 C25.2 C26.2 C30.2 C31.2 C32.2 C33.2 C34.2 C35.2 C36.2 C37.2 C41.2 C42.2 C43.2 C44.2 C45.2 C46.2 C47.2 C48.2 C52.2 C53.2 C54.2 C55.2 C56.2 C57.2 C58.2 C59.2 C63.2 C64.2 C65.2 C66.2 C67.2 C68.2 C69.2 C70.2 C74.2 C75.2 C76.2 C77.2 C78.2 C79.2 C80.2 C81.2 C85.2 C86.2 C87.2 C88.2 C89.2 C90.2 C91.2 C92.2 C93.2 C94.2 C95.2 C96.2 C97.2 C98.2 C99.2 C100.2 C101.2 C102.2 C103.2 C104.2 C107.2 C110.2 C111.2 C112.2 C113.2 C114.2 C115.2 C116.2 C117.2 C118.2 IC1.3 IC2.8 IC3.7 IC4.3 IC4.5 IC4.8 IC5.2 IC6.1 IC6.10 JP3.1 JP3.2 JP4.1 JP4.2 JP5.1 JP6.1 P9.3 P9.4 P9.5 P9.9 P9.10 R10.2 R13.1 R14.2 R18.1 R27.2 R30.1 R31.2 R35.1 R36.1 R46.2 R49.1 R50.2 R54.1 R55.1 R65.2 R68.1 R69.2 R73.1 R74.1 R84.2 R87.1 R88.2 R92.1 R93.1 R103.2 R106.1 R107.2 R111.1 R112.1 R122.2 R125.1 R126.2 R130.1 R131.1 R145.1 R146.1 R152.2 R164.1 R165.1 R166.2 R170.1 R171.1 U2.4 U3.4 U4.4 U5.4 U6.4 U7.4 U8.4 U9.1 U9.20 U9.21 U10.15 U12.4 U13.4 U14.4 U15.4 U16.4 U17.4 U18.4 U19.4 U20.4 U025.9 U025.16 U026.9 U026.13 U026.15 U$1.PIN$5 U$1.PIN$6 U$1.PIN$7 U$2.PIN$5 U$2.PIN$6 U$2.PIN$7 U$3.PIN$5 U$3.PIN$6 U$3.PIN$7 U$4.PIN$5 U$4.PIN$6 U$4.PIN$7 U$5.PIN$5 U$5.PIN$6 U$5.PIN$7 U$6.PIN$5 U$6.PIN$6 U$6.PIN$7 U$7.PIN$5 U$7.PIN$6 U$7.PIN$7 U$8.PIN$5 U$8.PIN$6 U$8.PIN$7 U$9.PIN$5 U$9.PIN$6 U$9.PIN$7 U$10.PIN$5 U$10.PIN$6 U$10.PIN$7 U$11.PIN$5 U$11.PIN$6 U$11.PIN$7 U$12.PIN$5 U$12.PIN$6 U$12.PIN$7 U$13.PIN$5 U$13.PIN$6 U$13.PIN$7 U$14.PIN$5 U$14.PIN$6 U$14.PIN$7 U$15.PIN$5 U$15.PIN$6 U$15.PIN$7 U$16.PIN$5 U$16.PIN$6 U$16.PIN$7
GND1: C105.2 C106.2 C108.2 C109.2 C119.2 C129.2 C130.2 C131.2 R139.1 U001.4 U011.4 U021.4 U026.1 U030.4 X002.G1 X002.G2 X003.8 X003.G1 X003.G2
ISENSE_0: JP1.1 U4.1 U4.2 U10.8
ISENSE_0_B: R18.2 U2.6 U4.3
ISENSE_1: JP1.2 U5.1 U5.2 U10.7
ISENSE_1_B: R35.2 U3.6 U5.3
ISENSE_2: JP1.3 U7.1 U7.2 U10.6
ISENSE_2_B: R54.2 U6.6 U7.3
ISENSE_3: JP1.4 U10.5 U12.1 U12.2
ISENSE_3_B: R73.2 U8.6 U12.3
ISENSE_4: JP1.5 U10.4 U14.1 U14.2
ISENSE_4_B: R92.2 U13.6 U14.3
ISENSE_5: JP1.6 U10.3 U16.1 U16.2
ISENSE_5_B: R111.2 U15.6 U16.3
ISENSE_6: JP1.7 U10.2 U18.1 U18.2
ISENSE_6_B: R130.2 U17.6 U18.3
ISENSE_7: JP1.8 U10.1 U20.1 U20.2
ISENSE_7_B: R170.2 U19.6 U20.3
LATCHED_FAULT: IC2.7 IC6.4 IC6.17
MISO: IC6.2 IC6.3 U10.13
MISO_A: U011.6 X002.2
MISO_B: U011.5 X002.1
MISO_BUFFER: IC6.18 R183.2 U046.2
MISO_I: R173.1 U011.3 U026.2
MISO_II: R183.1 U026.16 U046.1
MOSI: R176.1 U9.11 U10.14 U026.10
MOSI_A: R000.1 U021.8 X002.8
MOSI_B: R000.2 U021.7 X002.7
MOSI_I: R181.1 U021.2 U044.2
MOSI_II: R181.2 U026.8 U044.1
N$1: R1.1 R2.1 R3.2 R6.2 U$1.PIN$3
N$2: C1.1 R2.2
N$3: R17.1 R19.1 R20.2 R23.2 U$3.PIN$3
N$4: C3.2 R7.1 R9.2
N$5: C2.2 C120.2 R4.2 R7.2 R186.1 U$1.PIN$4
N$6: C2.1 R5.2
N$7: C3.1 R6.1 R8.2
N$8: R12.2 R13.2 U$2.PIN$4
N$9: C16.1 R19.2
N$10: C17.2 C121.2 R21.2 R24.2 R187.1 U$3.PIN$4
N$11: R10.1 U$1.PIN$8
N$12: R15.2 R16.1 U$2.PIN$3
N$13: C17.1 R22.2
N$14: R14.1 U$2.PIN$8
N$15: C1.2 R1.2 R11.1 R15.1 U2.2 U$1.PIN$1 U$1.PIN$2
N$16: C18.2 R24.1 R26.2
N$17: C18.1 R23.1 R25.2
N$18: R27.1 U$3.PIN$8
N$19: R29.2 R30.2 U$4.PIN$4
N$20: R31.1 U$4.PIN$8
N$21: R32.2 R33.1 U$4.PIN$3
N$22: C16.2 R17.2 R28.1 R32.1 U3.2 U$3.PIN$1 U$3.PIN$2
N$23: R33.2 R34.1 U$4.PIN$1 U$4.PIN$2
N$24: R36.2 U3.5
N$25: R37.1 R38.1 R39.2 R42.2 U$5.PIN$3
N$26: C27.1 R38.2
N$27: C28.2 C122.2 R40.2 R43.2 R185.1 U$5.PIN$4
N$28: C28.1 R41.2
N$29: C29.2 R43.1 R45.2
N$30: C29.1 R42.1 R44.2
N$31: R46.1 U$5.PIN$8
N$32: R48.2 R49.2 U$6.PIN$4
N$33: R50.1 U$6.PIN$8
N$34: R51.2 R52.1 U$6.PIN$3
N$35: C27.2 R37.2 R47.1 R51.1 U6.2 U$5.PIN$1 U$5.PIN$2
N$36: R52.2 R53.1 U$6.PIN$1 U$6.PIN$2
N$37: R55.2 U6.5
N$38: R56.1 R57.1 R58.2 R61.2 U$7.PIN$3
N$39: C38.1 R57.2
N$40: C39.2 C123.2 R59.2 R62.2 R192.1 U$7.PIN$4
N$41: C39.1 R60.2
N$42: C40.2 R62.1 R64.2
N$43: C40.1 R61.1 R63.2
N$44: R65.1 U$7.PIN$8
N$45: R67.2 R68.2 U$8.PIN$4
N$46: R69.1 U$8.PIN$8
N$47: R70.2 R71.1 U$8.PIN$3
N$48: C38.2 R56.2 R66.1 R70.1 U8.2 U$7.PIN$1 U$7.PIN$2
N$49: R71.2 R72.1 U$8.PIN$1 U$8.PIN$2
N$50: R74.2 U8.5
N$51: R75.1 R76.1 R77.2 R80.2 U$9.PIN$3
N$52: C49.1 R76.2
N$53: C50.2 C124.2 R78.2 R81.2 R188.1 U$9.PIN$4
N$54: C50.1 R79.2
N$55: C51.2 R81.1 R83.2
N$56: C51.1 R80.1 R82.2
N$57: R84.1 U$9.PIN$8
N$58: R86.2 R87.2 U$10.PIN$4
N$59: R88.1 U$10.PIN$8
N$60: R89.2 R90.1 U$10.PIN$3
N$61: C49.2 R75.2 R85.1 R89.1 U13.2 U$9.PIN$1 U$9.PIN$2
N$62: R90.2 R91.1 U$10.PIN$1 U$10.PIN$2
N$63: R93.2 U13.5
N$64: R94.1 R95.1 R96.2 R99.2 U$11.PIN$3
N$65: C60.1 R95.2
N$66: C83.2 C127.2 R135.2 R149.2 R190.1 U$15.PIN$4
N$67: C61.1 R98.2
N$68: C62.2 R100.1 R102.2
N$69: C62.1 R99.1 R101.2
N$70: R103.1 U$11.PIN$8
N$71: R105.2 R106.2 U$12.PIN$4
N$72: R107.1 U$12.PIN$8
N$73: R108.2 R109.1 U$12.PIN$3
N$74: C60.2 R94.2 R104.1 R108.1 U15.2 U$11.PIN$1 U$11.PIN$2
N$75: R109.2 R110.1 U$12.PIN$1 U$12.PIN$2
N$76: R112.2 U15.5
N$77: R113.1 R114.1 R115.2 R118.2 U$13.PIN$3
N$78: C71.1 R114.2
N$79: C72.2 C126.2 R116.2 R119.2 R191.1 U$13.PIN$4
N$80: C72.1 R117.2
N$81: C73.2 R119.1 R121.2
N$82: C73.1 R118.1 R120.2
N$83: R122.1 U$13.PIN$8
N$84: R124.2 R125.2 U$14.PIN$4
N$85: R126.1 U$14.PIN$8
N$86: R127.2 R128.1 U$14.PIN$3
N$87: C71.2 R113.2 R123.1 R127.1 U17.2 U$13.PIN$1 U$13.PIN$2
N$88: R128.2 R129.1 U$14.PIN$1 U$14.PIN$2
N$89: R131.2 U17.5
N$90: R132.1 R133.1 R134.2 R148.2 U$15.PIN$3
N$91: C82.1 R133.2
N$93: C83.1 R136.2
N$94: C84.2 R149.1 R151.2
N$95: C84.1 R148.1 R150.2
N$96: R152.1 U$15.PIN$8
N$98: R16.2 R147.1 U$2.PIN$1 U$2.PIN$2
N$99: R154.2 R165.2 U$16.PIN$4
N$101: R166.1 U$16.PIN$8
N$102: R167.2 R168.1 U$16.PIN$3
N$103: C82.2 R132.2 R153.1 R167.1 U19.2 U$15.PIN$1 U$15.PIN$2
N$104: R168.2 R169.1 U$16.PIN$1 U$16.PIN$2
N$105: R171.2 U19.5
N$106: R155.1 U9.6
N$107: R162.1 U9.15
N$108: R164.2 U2.5
N$109: R159.1 U9.18
N$110: R160.1 U9.17
N$111: R161.1 U9.16
N$112: R158.1 U9.2
N$113: LED2.C R145.2
N$114: LED3.A R141.1
N$115: R163.2 R184.2 U9.13
N$116: LED1.C R146.2
N$117: C61.2 C125.2 R97.2 R100.2 R189.1 U$11.PIN$4
N$122: C86.1 U9.4
N$123: C87.1 C95.1 U10.9
N$124: C88.1 C96.1 U10.10
N$125: R157.1 U9.3
N$127: R156.1 U9.5
N$130: C120.1 R3.1 R186.2
N$133: C121.1 R20.1 R187.2
N$148: C124.1 R77.1 R188.2
N$150: C125.1 R96.1 R189.2
N$151: C122.1 R39.1 R185.2
N$152: C123.1 R58.1 R192.2
N$153: C126.1 R115.1 R191.2
N$154: C127.1 R134.1 R190.2
NOT_LATCHED_FAULT: IC6.16 LED3.C R184.1
SCK_MS: IC6.8 R175.1 U9.10 U10.12 U026.11
SCK_MS_A: R172.1 U021.6 X002.5
SCK_MS_B: R172.2 U021.5 X002.4
SCK_MS_I: R180.1 U021.3 U043.2
SCK_MS_II: R180.2 U026.6 U043.1
SCK_SM: IC6.12 R182.2 U045.2
SCK_SM_A: U011.8 X002.6
SCK_SM_B: U011.7 X002.3
SCK_SM_I: R174.1 U011.2 U026.3
SCK_SM_II: R182.1 U026.14 U045.1
VCC: C4.1 C5.1 C6.1 C7.1 C8.1 C9.1 C11.+ C12.+ C13.+ C14.+ C19.1 C20.1 C21.1 C22.1 C23.1 C24.1 C30.1 C31.1 C32.1 C33.1 C34.1 C35.1 C41.1 C42.1 C43.1 C44.1 C45.1 C46.1 C52.1 C53.1 C54.1 C55.1 C56.1 C57.1 C63.1 C64.1 C65.1 C66.1 C67.1 C68.1 C74.1 C75.1 C76.1 C77.1 C78.1 C79.1 C100.1 C110.1 C111.1 C112.1 C113.1 C114.1 C115.1 IC1.1 LED1.A R12.1 R29.1 R48.1 R67.1 R86.1 R105.1 R124.1 R154.1 U031.P$2 U$1.PIN$10 U$1.PIN$11 U$2.PIN$10 U$2.PIN$11 U$3.PIN$10 U$3.PIN$11 U$4.PIN$10 U$4.PIN$11 U$5.PIN$10 U$5.PIN$11 U$6.PIN$10 U$6.PIN$11 U$7.PIN$10 U$7.PIN$11 U$8.PIN$10 U$8.PIN$11 U$9.PIN$10 U$9.PIN$11 U$10.PIN$10 U$10.PIN$11 U$11.PIN$10 U$11.PIN$11 U$12.PIN$10 U$12.PIN$11 U$13.PIN$10 U$13.PIN$11 U$14.PIN$10 U$14.PIN$11 U$15.PIN$10 U$15.PIN$11 U$16.PIN$10 U$16.PIN$11
VCC_I: P9.1 P9.2 P9.6 P9.7 P9.8 U031.P$1